# Altium PCB Foc_Core.pcbdoc
Units mil, origin at the board's own origin, x right, y up, seen from the top; angles counter-clockwise.
Board outline 1574.8 x 1574.8 mil, 4 copper layers (Top Layer, Mid-Layer 1, Mid-Layer 2, Bottom Layer); 21 components, 60 nets, 187 pads, 97 vias.
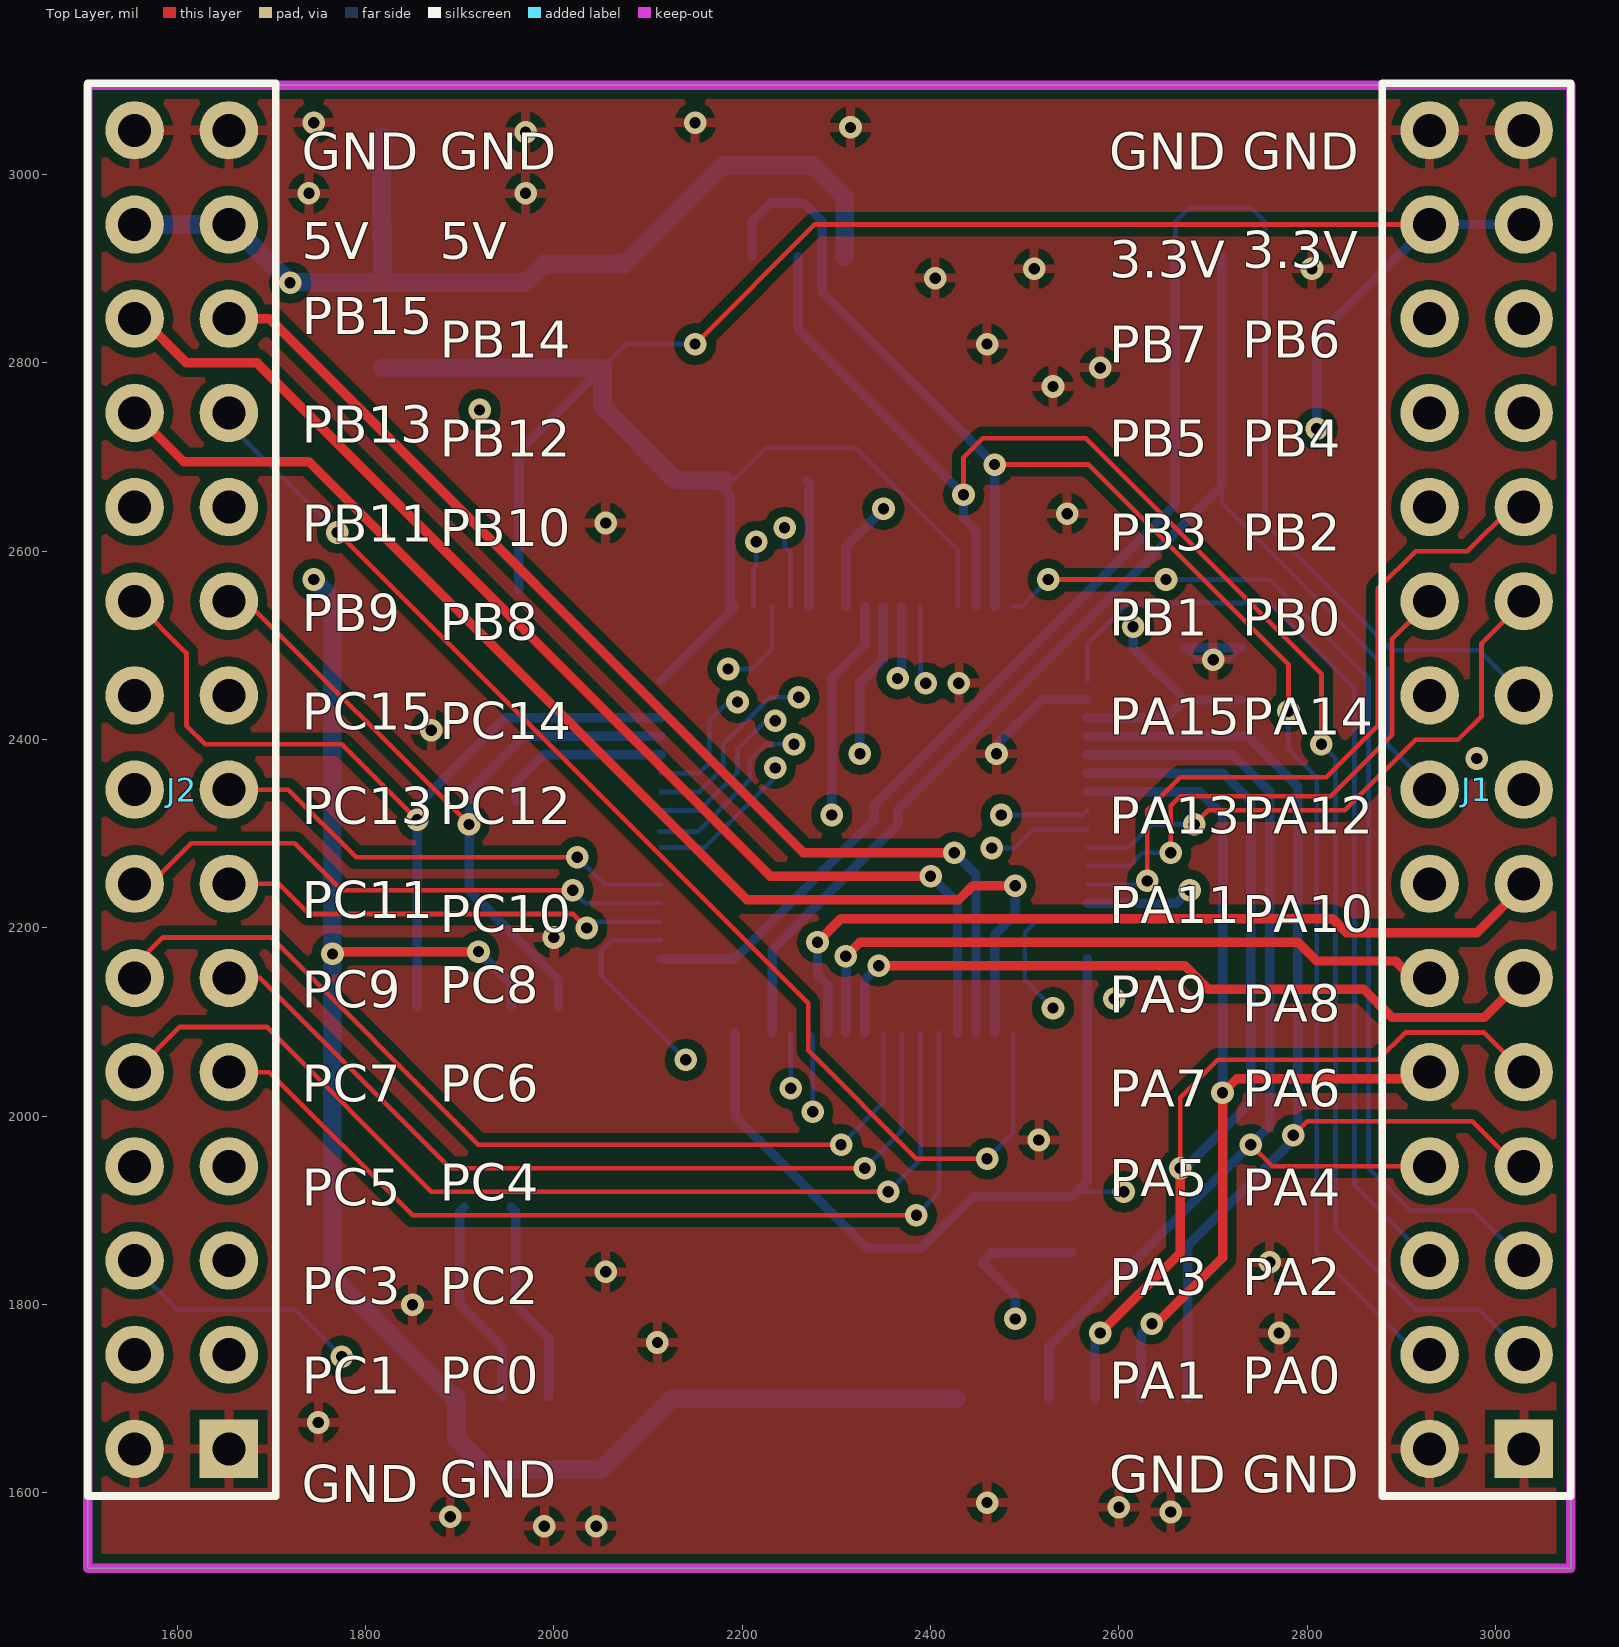
[diagram p0: Top Layer view]
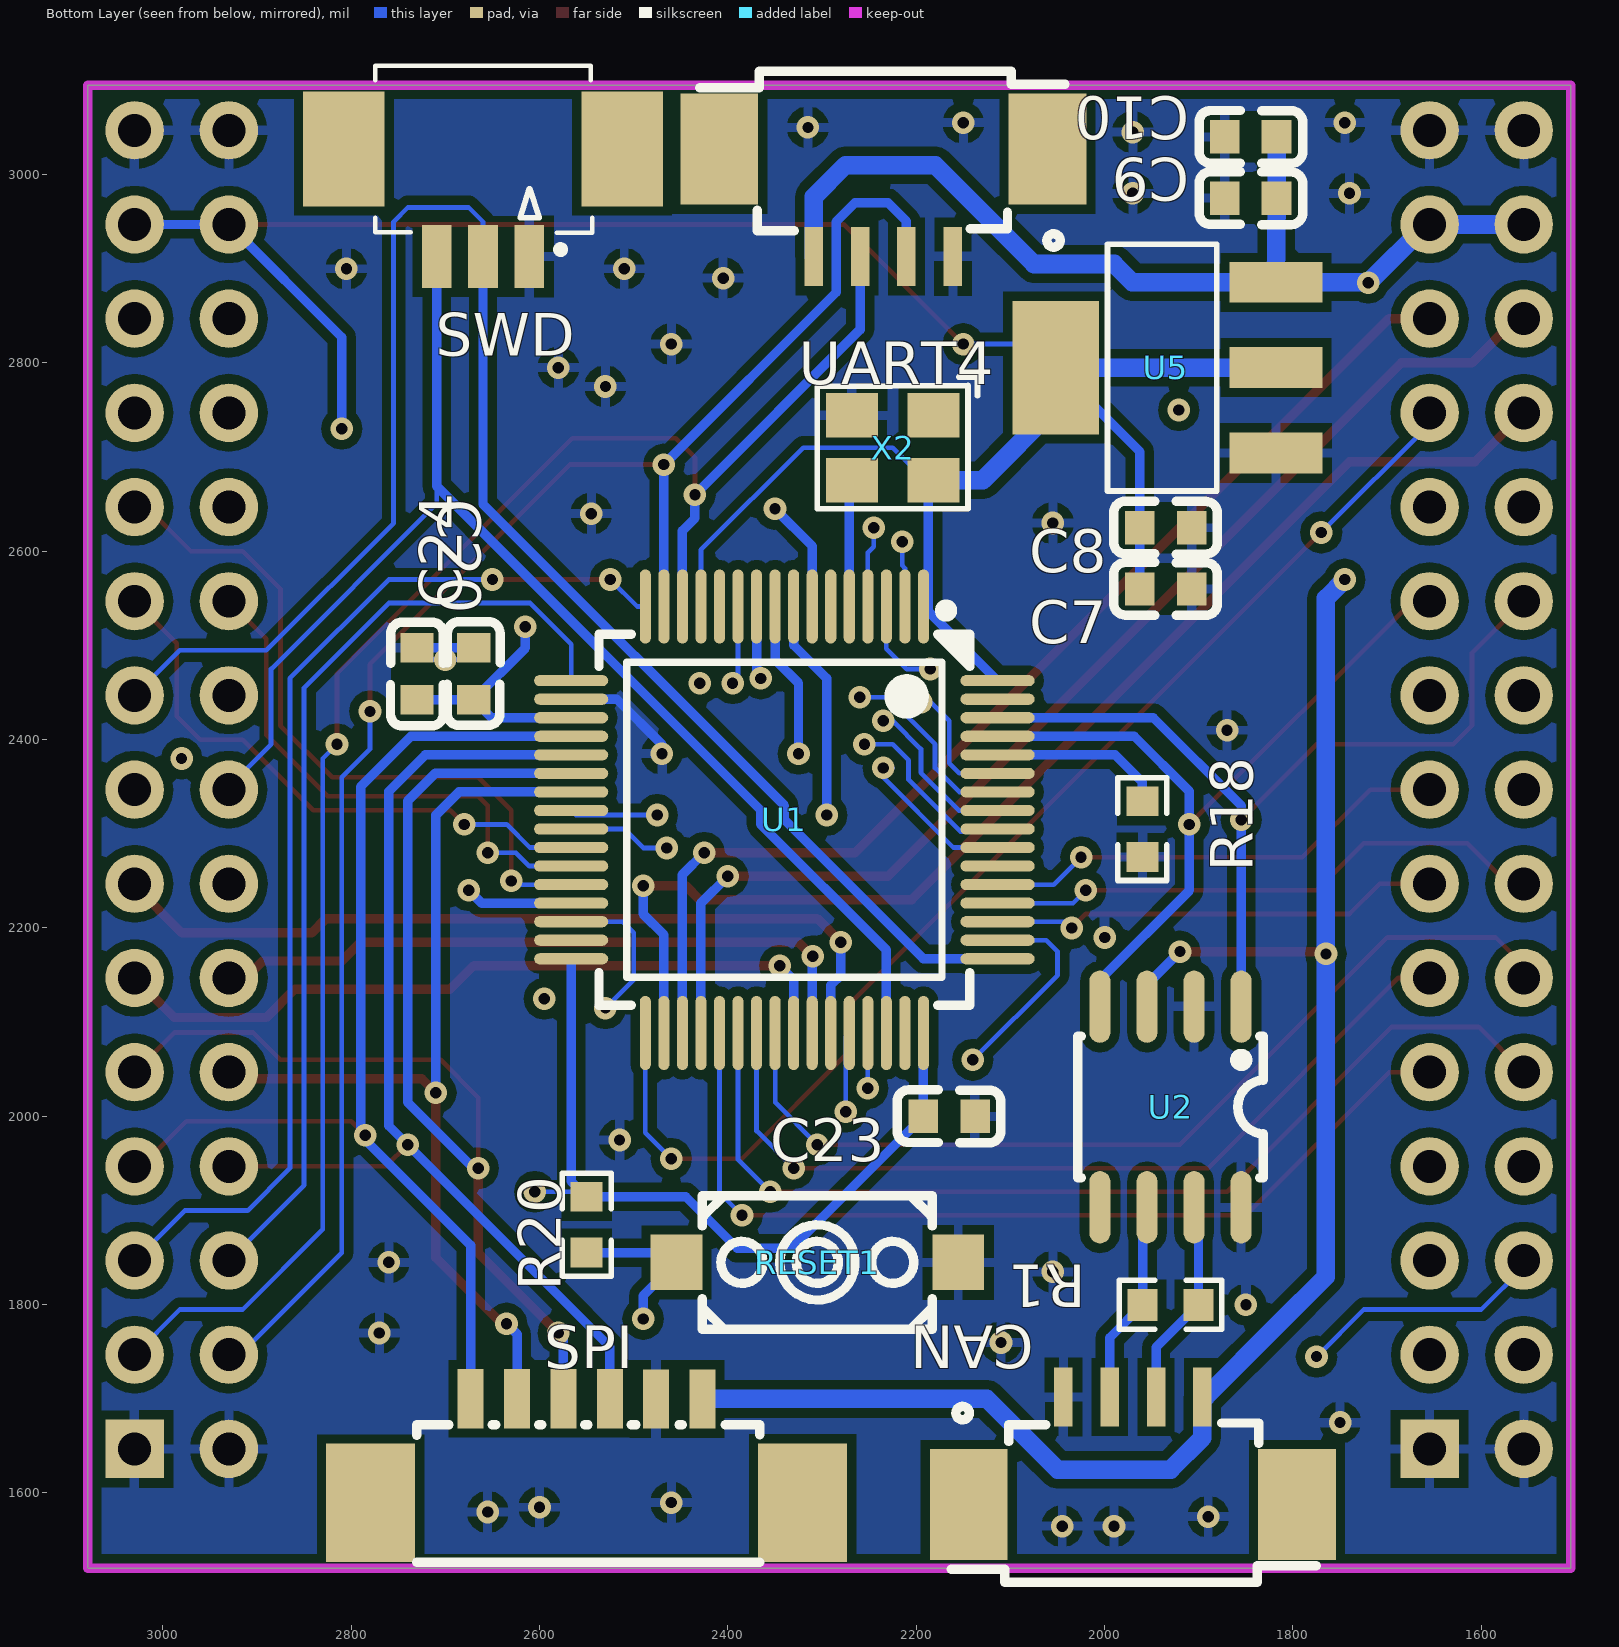
[diagram p1: Bottom Layer view, seen from below]
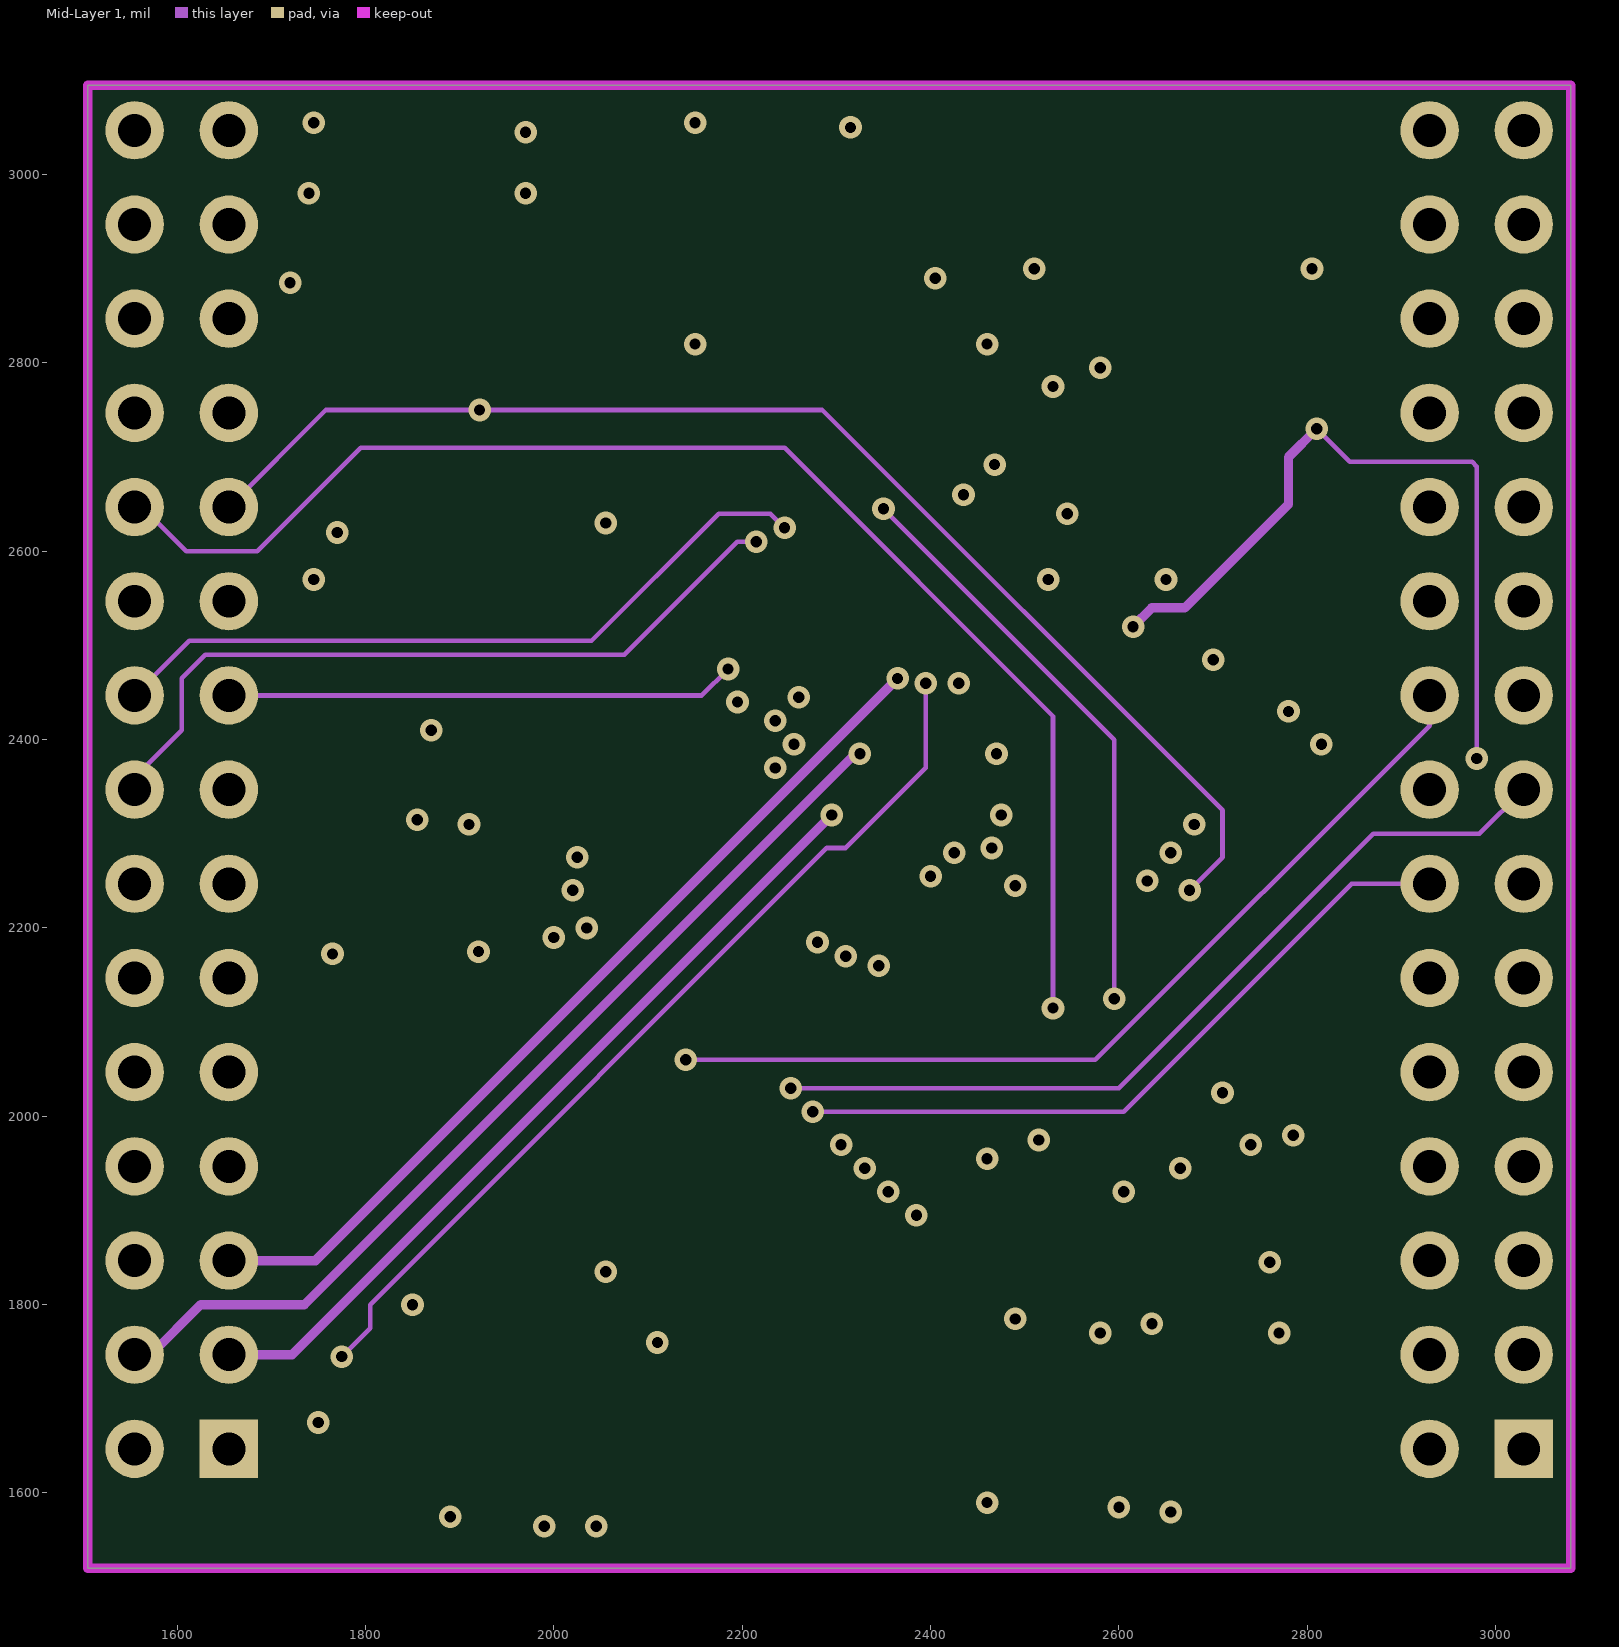
[diagram p2: Mid-Layer 1]
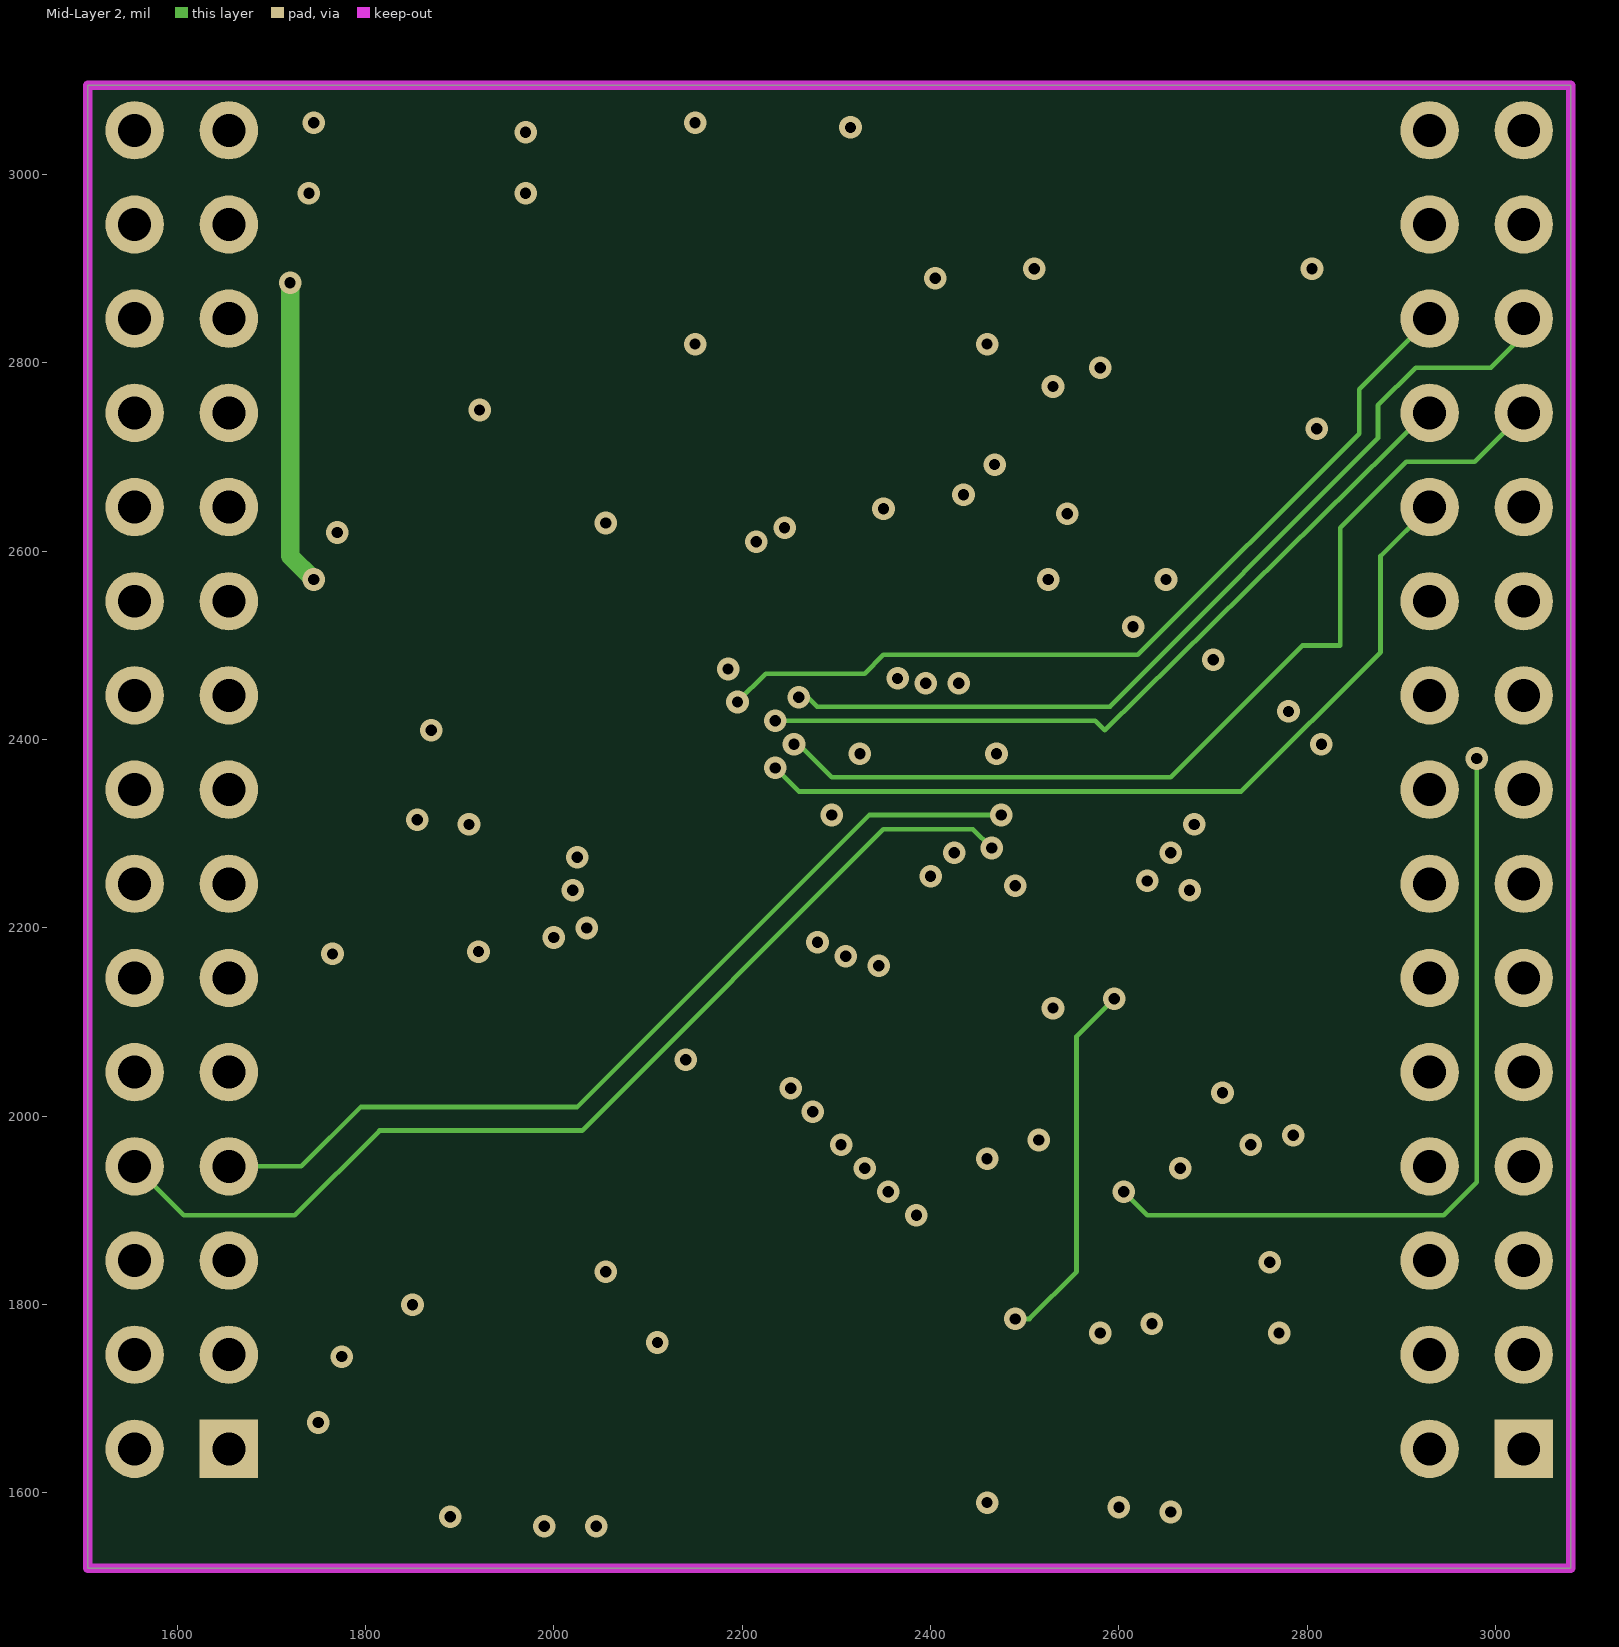
[diagram p3: Mid-Layer 2]

## Layer stack, top to bottom
Top Solder: solder mask 0.4, Solder Resist, Dk 3.5
Top Layer: signal copper 1.4
Dielectric1: dielectric 12.6, FR-4, Dk 4.8
Mid-Layer 1: signal copper 1.4
Dielectric3: dielectric 12.6, FR-4, Dk 4.8
Mid-Layer 2: signal copper 1.4
Dielectric2: dielectric 12.6, FR-4, Dk 4.8
Bottom Layer: signal copper 1.4
Bottom Solder: solder mask 0.4, Solder Resist, Dk 3.5

## Board outline
1505,1519.96 3079.8,1519.96 3079.8,3094.76 1505,3094.76

## Design rules (kind name [scope] priority, off if disabled: settings)
Clearance [All] p1: gap=10 ignorepadtopadclearanceinfootprint=FALSE except(0: Arc-Hole Track-Hole SMDPad-Hole THPad-Hole Via-Hole Fill-Hole Poly-Hole Region-Hole Text-Hole)
PolygonConnect [All] p1: connectstyle=Relief reliefconductorwidth=10 reliefentries=4 polygonreliefangle="90 Angle" airgapwidth=10
RoutingVias [All] p1: holewidth=28 width=50 viastyle="Through Hole" minholewidth=28 minwidth=50 maxholewidth=28 maxwidth=50
SolderMaskExpansion [All] p1: expansion=4 istentingtop=FALSE
Width [All] p1: maxlimit=10 minlimit=10 preferedwidth=10
30 further rules are at their usual default settings.

## Components (designator, comment, footprint, x,y, rotation, side; value= is the part's Value field where it differs from the comment)
C7 "22u" C0603 1935,2559.76 r0 bottom
C8 "0.1u" C0603 1935,2624.76 r0 bottom
C9 "22u" C0603 1845,2974.76 r180 bottom
C10 "0.1u" C0603 1845,3039.76 r180 bottom
C20 "10uF" C0603 2670,2469.76 r90 bottom
C23 "0.1uF" C0603 2165,1999.76 r0 bottom
C24 "10nF" C0603 2730,2469.76 r270 bottom
CAN "1.25-4P WT" CONN-SMD_1.25-4PWT 1970,1644.76 r180 bottom
J1 "HDR-M-2.54_2x15" HDR-M-2.54_2X15 2979.8,2346.73 r90 top
J2 "HDR-M-2.54_2x15" HDR-M-2.54_2X15 1605,2346.73 r90 top
R1 "120R" R0603 1930,1799.76 r180 bottom
R18 "1k" R0603 1960,2304.76 r270 bottom
R20 "1k" R0603 2550,1884.76 r270 bottom
RESET1 "K2-3.6×6.1_SMD" KEY-SMD_2P-L6.2-W3.6-LS8.0 2305,1844.76 r0 bottom
SPI "1.25T-6P-WT" CONN-SMD_6P-P1.25_1.25T-6P-WT 2550,1644.76 r0 bottom
SWD "1.25T-3PWT" CONN-SMD_3P-P1.25_1.25T-3PWT 2660,2969.76 r0 bottom
U1 "STM32F405RGT6" LQFP-64_L10.0-W10.0-P0.50-LS12.0-BL 2340,2314.76 r180 bottom
U2 "TJA1050T/CM,118" SOIC-8_L5.0-W4.0-P1.27-LS6.0-BL 1930,2009.76 r180 bottom
U5 "AMS1117-3.3" SOT-223-3_L6.5-W3.4-P2.30-LS7.0-BR 1935,2794.76 r0 bottom
UART4 "1.25-4P WT" CONN-SMD_1.25-4PWT 2235,2969.76 r0 bottom
X2 "8MHz" OSC-SMD_4P-L3.2-W2.5-BL 2225,2709.76 r180 bottom

## Footprints (in the part's own frame and the unit in brackets; to place one, negate y for a bottom-side part, rotate by r counter-clockwise, add the part's x,y. Pads: shape width x height; smd on the part's side, far side on the other; paste and mask are expansions set on the pad)
C0603 [mm]
  rect 0.8x0.9 smd: 1(0.7,0) 2(-0.7,0)
  silkscreen extent -1.39,-0.72 1.41,0.71
CONN-SMD_1.25-4PWT [mm]
  rect 0.5x1.6 smd: 1(-1.875,1.45) 2(-0.625,1.45) 3(0.625,1.45) 4(1.875,1.45)
  rect 2.1x3 smd: 5(-4.425,-1.45) 6(4.425,-1.45)
  silkscreen extent -4.9,-3.55 4.95,1.2
CONN-SMD_3P-P1.25_1.25T-3PWT [mm]
  rect 0.8x1.7 smd: 1(-1.25,1.45) 2(0,1.45) 3(1.25,1.45)
  rect 2.2x3.1 smd: 4(3.75,-1.45) 5(-3.75,-1.45)
  silkscreen extent -2.94,-3.7 2.9,1.36
CONN-SMD_6P-P1.25_1.25T-6P-WT [mm]
  rect 0.7x1.6 smd: 1(-3.125,-1.398) 2(-1.875,-1.398) 3(-0.625,-1.399) 4(0.625,-1.401) 5(1.875,-1.401) 6(3.125,-1.402)
  rect 2.4x3.2 smd: 7(5.825,1.402) 8(-5.825,1.401)
  silkscreen extent -4.67,-0.7 4.58,3
HDR-M-2.54_2X15 [mil]
  rect 62x62 hole 35: 1(-700,-50)
  round 62 hole 35: 2(-700,50) 3(-600,-50) 4(-600,50) 5(-500,-50) 6(-500,50) 7(-400,-50) 8(-400,50) 9(-300,-50) 10(-300,50) 11(-200,-50) 12(-200,50) 13(-100,-50) 14(-100,50) 15(0,-50) 16(0,50) 17(100,-50) 18(100,50) 19(200,-50) 20(200,50) 21(300,-50) 22(300,50) 23(400,-50) 24(400,50) 25(500,-50) 26(500,50) 27(600,-50) 28(600,50) 29(700,-50) 30(700,50)
  silkscreen extent -750,-100 750,100
KEY-SMD_2P-L6.2-W3.6-LS8.0 [mm]
  rect 1.4x1.5 smd: 1(3.8,0) 2(-3.8,0)
  silkscreen extent -3.1,-1.8 3.1,1.8
LQFP-64_L10.0-W10.0-P0.50-LS12.0-BL [mm]
  oval 0.3x2 smd: 1(3.75,5.75) 2(3.25,5.75) 3(2.75,5.75) 4(2.25,5.75) 5(1.75,5.75) 6(1.25,5.75) 7(0.75,5.75) 8(0.25,5.75) 9(-0.25,5.75) 10(-0.75,5.75) 11(-1.25,5.75) 12(-1.75,5.75) 13(-2.25,5.75) 14(-2.75,5.75) 15(-3.25,5.75) 16(-3.75,5.75) 33(-3.75,-5.75) 34(-3.25,-5.75) 35(-2.75,-5.75) 36(-2.25,-5.75) 37(-1.75,-5.75) 38(-1.25,-5.75) 39(-0.75,-5.75) 40(-0.25,-5.75) 41(0.25,-5.75) 42(0.75,-5.75) 43(1.25,-5.75) 44(1.75,-5.75) 45(2.25,-5.75) 46(2.75,-5.75) 47(3.25,-5.75) 48(3.75,-5.75)
  oval 2x0.3 smd: 17(-5.75,3.75) 18(-5.75,3.25) 19(-5.75,2.75) 20(-5.75,2.25) 21(-5.75,1.75) 22(-5.75,1.25) 23(-5.75,0.75) 24(-5.75,0.25) 25(-5.75,-0.25) 26(-5.75,-0.75) 27(-5.75,-1.25) 28(-5.75,-1.75) 29(-5.75,-2.25) 30(-5.75,-2.75) 31(-5.75,-3.25) 32(-5.75,-3.75) 49(5.75,-3.75) 50(5.75,-3.25) 51(5.75,-2.75) 52(5.75,-2.25) 53(5.75,-1.75) 54(5.75,-1.25) 55(5.75,-0.75) 56(5.75,-0.25) 57(5.75,0.25) 58(5.75,0.75) 59(5.75,1.25) 60(5.75,1.75) 61(5.75,2.25) 62(5.75,2.75) 63(5.75,3.25) 64(5.75,3.75)
  silkscreen extent -5,-5 5,5.79
OSC-SMD_4P-L3.2-W2.5-BL [mm]
  rect 1.4x1.2 smd: 1(1.1,0.875) 2(-1.1,0.875) 3(-1.1,-0.875) 4(1.1,-0.875)
  silkscreen extent -2.03,-1.65 2.29,1.9
R0603 [mil]
  rect 31.75x34.02 smd: 1(29.65,0) 2(-29.65,0)
  silkscreen extent -55,-26 55,26
SOIC-8_L5.0-W4.0-P1.27-LS6.0-BL [mil]
  oval 22.38x76.78 smd: 1(75,106.5) 2(25,106.5) 3(-25,106.5) 4(-75,106.5) 5(-75,-106.5) 6(-25,-106.5) 7(25,-106.5) 8(75,-106.5)
  silkscreen extent -98,-75 98,75
SOT-223-3_L6.5-W3.4-P2.30-LS7.0-BR [mm]
  rect 2.5x1.1 smd: 1(-2.97,2.3) 2(-2.97,0) 3(-2.97,-2.3)
  rect 2.34x3.6 smd: 4(2.97,0)
  silkscreen extent -1.37,-3.33 1.57,3.33

## Via types
v1: diameter 24, hole 12, Top Layer to Bottom Layer, 97 vias

## Nets (pads, with @x,y where several pads share a name; then routed paths per layer and width w, separated by ;. In a path a pad name is that pad's centre, name@x,y a point inside that pad or via, vN(x,y) a via of type N, cw(c..) or ccw(c..) an arc to the next point about the centre after c; other vN are vias at no path point)
+3.3V: C7.1 C8.1 C20.2 C23.1 C24.1 J1.27 J1.28 R20.2 U1.1 U1.13 U1.19 U1.32 U1.48 U1.64 U5.2 U5.4 X2.4 | length 5406.1
  Top Layer w5: v1(2150,2819.76) 2276.97,2946.73 J1.28
  Mid-Layer 1 w5: v1(2810,2729.76) 2845,2694.76 2975,2694.76 2980,2689.76 v1(2980,2379.76)
  Mid-Layer 1 w10: v1(2615,2519.76) 2635,2539.76 2670,2539.76 2780,2649.76 2780,2699.76 v1(2810,2729.76)
  Mid-Layer 2 w5: v1(2605,1919.76) 2630,1894.76 2945,1894.76 2980,1929.76 v1(2980,2379.76)
  Bottom Layer w5: U5.4 2076.93,2819.76 v1(2150,2819.76) ; X2.4 2190.55,2675.31 2225,2709.76 2320,2709.76 2428.6,2601.16 U1.13@2428.6,2541.16 ; R20.2 2555.34,1919.76 v1(2605,1919.76)
  Bottom Layer w10: C7.1 C8.1 1962.56,2705.39 U5.4 ; U1.64 U1.1 ; X2.4@2176.69,2670.31 2187.36,2659.64 U1.1@2187.36,2536.13 ; U1.48 C23.1 2332.6,1859.76 2390,1859.76 2444.7,1914.46 R20.2@2550,1914.46 ; R20.2 2566.37,1930.79 U1.32 ; U1.19 2650.83,2423.03 C20.2 ; v1(2615,2519.76) 2615,2497.2 C20.2 ; C24.1 C20.2 ; v1(2810,2729.76) 2810,2826.93 J1.28 J1.27
  Bottom Layer w19.68: U5.2 U5.4 2051.93,2752.83 2129.45,2675.31 X2.4
+5V: C9.1 C10.1 CAN.4 J2.27 J2.28 SPI.1 U2.3 U5.3 UART4.4 | length 3169
  Top Layer w10: v1(1765,2172.26) 1767.5,2174.76 v1(1920,2174.76)
  Mid-Layer 2 w19.68: v1(1720,2884.76) 1720,2594.76 v1(1745,2569.76)
  Bottom Layer w10: v1(1920,2174.76) 1955,2139.76 U2.3
  Bottom Layer w19.68: J2.28 J2.27 1658.03,2946.73 v1(1720,2884.76) 1720.55,2885.31 U5.3 ; v1(1745,2569.76) 1765,2549.76 v1(1765,2172.26) 1765,1829.76 1815,1779.76 1892.92,1701.84 CAN.4 1896.2,1658.56 1930,1624.76 2050,1624.76 2125,1699.76 SPI.1 ; C9.1 U5.3 1970.5,2885.26 1990,2904.76 2075,2904.76 2180,3009.76 2275,3009.76 2308.8,2975.96 UART4.4 ; C9.1 C10.1
CAN1_RX: J2.19 U1.61 U2.4 | length 848.9
  Top Layer w5: J2.19 1673.03,2546.73 v1(1910,2309.76)
  Bottom Layer w10: U2.4 2005,2144.76 1910,2239.76 1910,2344.76 1968.6,2403.36 U1.61@2113.6,2403.36
CAN1_TX: J2.20 U1.62 U2.1 | length 951.9
  Top Layer w5: J2.20 1610,2491.73 1610,2434.76 1610,2414.76 1630,2394.76 1775,2394.76 v1(1855,2314.76)
  Bottom Layer w10: U2.1 1855,2329.76 1948.3,2423.06 U1.62@2113.6,2423.06
CAN_H: CAN.3 R1.1 U2.7 | length 222
  Bottom Layer w10: U2.7 1900.34,1898.6 R1.1 1945.4,1754.7 CAN.3
CAN_L: CAN.2 R1.2 U2.6 | length 217.8
  Bottom Layer w10: U2.6 1959.66,1898.6 R1.2 1994.61,1764.81 CAN.2
GND: C7.2 C8.2 C9.2 C10.2 C20.1 C23.2 C24.2 CAN.1 J1.1 J1.2 J1.29 J1.30 J2.1 J2.2 J2.29 J2.30 R18.1 RESET1.2 SPI.2 SWD.1 U1.12 U1.18 U1.63 U2.2 U2.8 U5.1 UART4.1 X2.2 | length 256.6
  Bottom Layer w5: C20.1 2682.56,2484.76 v1(2700,2484.76) 2717.44,2484.76 C24.2
  Bottom Layer w10: v1(2470,2384.76) 2470,2394.76 2517.95,2442.71 U1.18 ; C20.1 C24.2
  other v1: 1990,1564.76 2045,1564.76 1890,1574.76 2655,1579.76 2600,1584.76 2460,1589.76 1750,1674.76 2110,1759.76 2770,1769.76 1850,1799.76 2055,1834.76 2760,1844.76 2515,1974.76 2000,2189.76 1870,2409.76 2430,2459.76 2055,2629.76 2545,2639.76 2530,2774.76 2580,2794.76 2460,2819.76 2405,2889.76 2510,2899.76 2805,2899.76 1740,2979.76 1970,2979.76 1970,3044.76 2315,3049.76 1745,3054.76 2150,3054.76
IIC1_SCL: J1.25 U1.58 | length 1178
  Mid-Layer 2 w5: v1(2260,2444.76) 2269.46,2444.76 2279.46,2434.76 ; 2280,2434.76 2590.72,2434.76 ; 2590,2434.76 2875,2719.76 2875,2754.76 2915,2794.76 2995,2794.76 3029.8,2829.56 J1.25@3029.8,2846.76
  Bottom Layer w5: U1.58 2154.5,2344.26 2180,2369.76 2180,2394.76 2230,2444.76 v1(2260,2444.76)
IIC1_SDA: J1.26 U1.59 | length 1070.2
  Mid-Layer 2 w5: v1(2195,2439.76) 2225,2469.76 2330,2469.76 2350,2489.76 2620,2489.76 2855,2724.76 2855,2771.93 J1.26
  Bottom Layer w5: U1.59 2154.2,2363.96 2165,2374.76 2165,2419.76 2185,2439.76 v1(2195,2439.76)
INC_A: J2.9 U1.37 | length 996.5
  Top Layer w5: J2.9@1655,2046.76 1698,2046.76 1850,1894.76 v1(2385,1894.76)
  Bottom Layer w5: v1(2385,1894.76) 2408.9,1918.66 U1.37
INC_B: J2.10 U1.38 | length 1075.2
  Top Layer w5: J2.10 1603.03,2094.76 1695,2094.76 1870,1919.76 v1(2355,1919.76)
  Bottom Layer w5: v1(2355,1919.76) 2389.21,1953.97 U1.38
INC_Z: J2.11 U1.39 | length 918.7
  Top Layer w5: J2.11 1688.03,2146.73 1890,1944.76 v1(2330,1944.76)
  Bottom Layer w5: v1(2330,1944.76) 2369.53,1984.29 U1.39
IU: J2.3 U1.8 | length 1113.3
  Mid-Layer 1 w10: J2.3@1655,1746.76 1722,1746.76 v1(2295,2319.76)
  Bottom Layer w10: v1(2295,2319.76) 2295,2464.76 2330.16,2499.92 U1.8
IV: J2.4 U1.9 | length 1200.9
  Mid-Layer 1 w10: J2.4@1555,1746.76 1572,1746.76 1625,1799.76 1735,1799.76 2320,2384.76 v1(2325,2384.76)
  Bottom Layer w10: v1(2325,2384.76) 2325,2459.76 2349.84,2484.6 U1.9
IW: J2.5 U1.10 | length 1044.2
  Mid-Layer 1 w10: J2.5 1746.97,1846.73 v1(2365,2464.76)
  Bottom Layer w10: v1(2365,2464.76) 2369.53,2469.29 U1.10
PA2: J1.5 U1.16 | length 1158.1
  Top Layer w5: v1(2525,2569.76) v1(2650,2569.76)
  Bottom Layer w5: U1.16 2496.37,2541.13 v1(2525,2569.76) ; v1(2650,2569.76) 2760,2569.76 2865,2464.76 2865,1944.76 2910,1899.76 2976.8,1899.76 J1.5@3029.8,1846.76
PA3: J1.6 U1.17 | length 1018.8
  Bottom Layer w5: U1.17 2566.4,2501.16 2610,2544.76 2760,2544.76 2850,2454.76 2850,1926.56 J1.6@2929.8,1846.76
PA11: J1.14 U1.44 | length 840.3
  Mid-Layer 1 w5: v1(2275,2004.76) 2605,2004.76 2847,2246.76 J1.14@2929.8,2246.76
  Bottom Layer w5: U1.44 2275,2084.49 v1(2275,2004.76)
PA12: J1.15 U1.45 | length 968.3
  Mid-Layer 1 w5: v1(2251.42,2029.76) 2600,2029.76 2870,2299.76 2982.8,2299.76 J1.15@3029.8,2346.76
  Bottom Layer w5: v1(2251.42,2029.76) U1.45
PA15: J1.18 U1.50 | length 1189.9
  Mid-Layer 1 w5: v1(2140,2059.76) 2575,2059.76 2929.8,2414.56 J1.18@2929.8,2446.76
  Bottom Layer w5: U1.50@2113.6,2186.86 2062.1,2186.86 2050,2174.76 2050,2149.76 v1(2140,2059.76)
PB0: J1.19 U1.26 | length 616.9
  Top Layer w5: v1(2680,2309.76) 2695,2324.76 2840,2324.76 2915,2399.76 2960,2399.76 2985,2424.76 2985,2501.96 J1.19@3029.8,2546.76
  Bottom Layer w5: U1.26@2566.4,2285.26 2610.5,2285.26 2635,2309.76 v1(2680,2309.76)
PB1: J1.20 U1.27 | length 569
  Top Layer w5: v1(2655,2279.76) 2655,2299.76 2655,2329.76 2665,2339.76 2825,2339.76 2890,2404.76 2890,2506.93 J1.20
  Bottom Layer w5: U1.27 2610.79,2265.55 2625,2279.76 v1(2655,2279.76)
PB2: J1.21 U1.28 | length 758.4
  Top Layer w5: v1(2630,2249.76) 2630,2324.76 2665,2359.76 2820,2359.76 2875,2414.76 2875,2559.76 2915,2599.76 2970,2599.76 3017,2646.76 J1.21@3029.8,2646.76
  Bottom Layer w5: U1.28 2626.1,2245.86 v1(2630,2249.76)
PB3: J1.22 U1.55 | length 1062.4
  Mid-Layer 2 w5: v1(2235,2369.76) 2260,2344.76 2730,2344.76 2877.8,2492.56 2877.8,2594.76 J1.22@2929.8,2646.76
  Bottom Layer w5: U1.55@2113.6,2285.26 2160.5,2285.26 2235,2359.76 v1(2235,2369.76) v1@2225,2369.76
PB4: J1.23 U1.56 | length 1216.5
  Mid-Layer 2 w5: v1(2255,2394.76) 2260,2394.76 2295,2359.76 2655,2359.76 2795,2499.76 2835,2499.76 2835,2624.76 2905,2694.76 2977.8,2694.76 J1.23@3029.8,2746.76
  Bottom Layer w5: U1.56@2111.81,2302.34 2153.35,2302.34 2208.19,2357.18 2208.19,2377.95 2225,2394.76 v1(2255,2394.76)
PB5: J1.24 U1.57 | length 1012.5
  Mid-Layer 2 w5: v1(2235,2419.76) 2575,2419.76 2585,2409.76 2927,2746.76 J1.24@2929.8,2746.76
  Bottom Layer w5: U1.57 2154.84,2324.6 2195,2364.76 2195,2389.76 2225,2419.76 v1(2235,2419.76)
PB10: J2.21 U1.29 | length 1487.5
  Mid-Layer 1 w5: J2.21@1655,2646.76 1758,2749.76 v1(1921.18,2749.76) 2285,2749.76 2710,2324.76 2710,2274.76 v1(2675,2239.76)
  Bottom Layer w10: U1.29 2661.42,2226.18 v1(2675,2239.76)
PB11: J2.22 U1.30 | length 1631.7
  Mid-Layer 1 w5: J2.22@1555,2646.76 1563,2646.76 1610,2599.76 1685,2599.76 1795,2709.76 2245,2709.76 2530,2424.76 v1(2530,2114.76)
  Bottom Layer w5: v1(2530,2114.76) 2500,2144.76 2500,2164.76 2500,2194.76 2511.73,2206.49 2515,2206.49 U1.30
PB12: J2.23 U1.33 | length 1314.4
  Top Layer w5: v1(1770,2619.76) 2270,2119.76 2270,2069.76 2385,1954.76 v1(2460,1954.76)
  Bottom Layer w5: J2.23 1655,2734.76 v1(1770,2619.76) ; v1(2460,1954.76) 2487.64,1982.4 U1.33
PC3: J2.6 U1.11 | length 1333.6
  Mid-Layer 1 w5: v1(1775,1744.76) 1805,1774.76 1805,1799.76 2290,2284.76 2310,2284.76 2395,2369.76 v1(2395,2459.76)
  Bottom Layer w5: J2.6 1555,1839.76 1600,1794.76 1725,1794.76 v1(1775,1744.76) ; U1.11 2389.21,2465.55 v1(2395,2459.76)
PC4: J2.7 U1.24 | length 1067.9
  Mid-Layer 2 w5: J2.7 1731.97,1946.73 1795,2009.76 2025,2009.76 2335,2319.76 v1(2475,2319.76)
  Bottom Layer w5: v1(2475,2319.76) 2561.53,2319.76 U1.24
PC5: J2.8 U1.25 | length 1219.4
  Mid-Layer 2 w5: J2.8 1606.97,1894.76 1725,1894.76 1815,1984.76 2030,1984.76 2350,2304.76 2445,2304.76 v1(2465,2284.76)
  Bottom Layer w5: v1(2465,2284.76) 2490,2284.76 2510.16,2304.92 U1.25
PC9: J2.12 U1.40 | length 1003.8
  Top Layer w5: J2.12@1555,2146.76 1555,2159.76 1585,2189.76 1700,2189.76 1920,1969.76 v1(2305,1969.76)
  Bottom Layer w5: v1(2305,1969.76) 2349.84,2014.6 U1.40
PC10: J2.13 U1.51 | length 480.9
  Top Layer w5: J2.13@1655,2246.76 1708,2246.76 1740,2214.76 2020,2214.76 v1(2035,2199.76)
  Bottom Layer w5: v1(2035,2199.76) 2041.73,2206.49 U1.51
PC11: J2.14 U1.52 | length 602.8
  Top Layer w5: J2.14 1571.97,2246.73 1615,2289.76 1725,2289.76 1775,2239.76 v1(2020,2239.76)
  Bottom Layer w5: v1(2020,2239.76) 2033.58,2226.18 U1.52
PC12: J2.15 U1.53 | length 500.4
  Top Layer w5: J2.15 1718.03,2346.73 1790,2274.76 v1(2025,2274.76)
  Bottom Layer w5: v1(2025,2274.76) 2053.9,2245.86 U1.53
PC13: J2.16 U1.2 | length 878.7
  Mid-Layer 1 w5: J2.16 1555,2359.76 1605,2409.76 1605,2464.76 1630,2489.76 2075,2489.76 2195,2609.76 v1(2215,2609.76)
  Bottom Layer w5: U1.2@2212.05,2541.13 2212.05,2581.81 2215,2584.76 v1(2215,2609.76)
PC14: J2.17 U1.3 | length 642
  Mid-Layer 1 w5: J2.17 2156.97,2446.73 v1(2185,2474.76)
  Bottom Layer w5: v1(2185,2474.76) 2210,2474.76 2231.7,2496.46 U1.3@2231.7,2541.16
PC15: J2.18 U1.4 | length 862.4
  Mid-Layer 1 w5: J2.18@1555,2446.76 1613,2504.76 2040,2504.76 2175,2639.76 2230,2639.76 v1(2245,2624.76)
  Bottom Layer w5: v1(2245,2624.76) 2245,2604.76 2251.4,2598.36 U1.4@2251.4,2541.16
PWM1: J1.11 U1.41 | length 802.5
  Top Layer w10: v1(2345,2159.76) 2670,2159.76 2695,2134.76 2860,2134.76 2890,2104.76 2987.8,2104.76 J1.11@3029.8,2146.76
  Bottom Layer w10: U1.41 2330.16,2144.92 v1(2345,2159.76)
PWM1N: J2.24 U1.34 | length 1320.9
  Top Layer w10: J2.24@1555,2746.76 1607,2694.76 1740,2694.76 2205,2229.76 2430,2229.76 2445,2244.76 v1(2490,2244.76)
  Bottom Layer w10: U1.34 2467.95,2192.71 2490,2214.76 v1(2490,2244.76)
PWM2: J1.12 U1.42 | length 723.3
  Top Layer w10: v1(2310,2169.76) 2325,2184.76 2790,2184.76 2810,2164.76 2893.76,2164.76 2911.79,2146.73 J1.12
  Bottom Layer w10: v1(2310,2169.76) 2310.47,2169.29 U1.42
PWM2N: J2.25 U1.35 | length 1205.9
  Top Layer w10: J2.25@1655,2846.76 1698,2846.76 2265,2279.76 v1(2425,2279.76)
  Bottom Layer w10: v1(2425,2279.76) 2448.27,2256.49 U1.35
PWM3: J1.13 U1.43 | length 890
  Top Layer w10: v1(2280,2184.76) 2305,2209.76 2826.62,2209.76 2841.62,2194.76 2980,2194.76 3029.8,2244.56 J1.13
  Bottom Layer w10: v1(2280,2184.76) 2280,2149.76 2290.79,2138.97 U1.43
PWM3N: J2.26 U1.36 | length 1268.4
  Top Layer w10: J2.26@1555,2846.76 1563,2846.76 1610,2799.76 1685,2799.76 2230,2254.76 v1(2400,2254.76)
  Bottom Layer w10: v1(2400,2254.76) 2428.58,2226.18 U1.36
R18_2: R18.2 U1.60 | length 186.3
  Bottom Layer w10: R18.2@1960,2334.46 1960,2354.76 1989,2383.76 U1.60@2114,2383.76
RESET: R20.1 RESET1.1 U1.7 | length 1308.1
  Mid-Layer 1 w5: v1(2350,2644.76) 2595,2399.76 v1(2595,2124.76)
  Mid-Layer 2 w5: v1(2490,1784.76) 2505,1784.76 2555,1834.76 2555,2084.76 v1(2595,2124.76)
  Bottom Layer w10: U1.7 2310.47,2605.23 v1(2350,2644.76) ; v1(2490,1784.76) 2490,1809.36 RESET1.1 2464.94,1855.1 R20.1
S$1126: 
SPI1_CS: J1.7 SPI.6 U1.20 | length 1217.9
  Top Layer w5: v1(2785,1979.76) 2800,1994.76 2975,1994.76 3023,1946.76 J1.7@3029.8,1946.76
  Bottom Layer w10: U1.20@2566.4,2403.36 2736.4,2403.36 2790,2349.76 2790,1979.76 v1(2785,1979.76) 2785,1974.77 2673,1862.76 SPI.6
SPI1_MISO: J1.9 SPI.4 U1.22 | length 1426.4
  Top Layer w5: v1(2665,1944.76) 2665,2019.76 2705,2059.76 2875,2059.76 2904,2088.76 2987.8,2088.76 J1.9@3029.8,2046.76
  Top Layer w10: v1(2580,1769.76) 2665,1854.76 v1(2665,1944.76)
  Bottom Layer w10: U1.22 2615,2363.97 ; U1.22 2710.8,2363.96 2740,2334.76 2740,2014.76 2670,1944.76 v1(2665,1944.76) ; SPI.4 2574.61,1764.37 v1(2580,1769.76)
SPI1_MOSI: J1.10 SPI.5 U1.23 | length 1041.1
  Top Layer w10: v1(2635,1779.76) 2640,1779.76 2710,1849.76 v1(2710,2024.76) 2725,2039.76 2922.83,2039.76 J1.10
  Bottom Layer w10: U1.23 2685.5,2344.26 2710,2319.76 v1(2710,2024.76) ; SPI.5 2623.82,1768.58 v1(2635,1779.76)
SPI1_SCK: J1.8 SPI.3 U1.21 | length 1151.1
  Top Layer w5: v1(2740,1969.76) 2763.03,1946.73 J1.8
  Bottom Layer w10: SPI.3 2525.4,1755.16 2760,1989.76 2760,2344.76 2721.1,2383.66 U1.21
SPI_7: SPI.7
SPI_8: SPI.8
SWC: J1.17 SWD.2 U1.49 | length 1833.1
  Bottom Layer w5: SWD.2 2660,2949.76 2675,2964.76 2740,2964.76 2755,2949.76 2755,2629.76 2890,2494.76 2981.8,2494.76 J1.17@3029.8,2446.76
  Bottom Layer w10: U1.49@2113.6,2167.16 2192.4,2167.16 2340,2314.76 2340,2329.76 2660,2649.76 SWD.2
SWD: J1.16 SWD.3 U1.46 | length 1679.4
  Bottom Layer w5: SWD.3 2709.2,2650.56 2885,2474.76 2885,2394.76 2929.8,2349.96 J1.16@2929.8,2346.76
  Bottom Layer w10: U1.46 2231.7,2176.46 2365,2309.76 2365,2324.76 2709.2,2668.96 SWD.3
U2_5: U2.5
UART4_RX: J1.4 U1.15 UART4.2 | length 1979.4
  Top Layer w5: v1@2467.9,2691.86 2567.9,2691.86 2780,2479.76 v1(2780,2429.76)
  Bottom Layer w5: v1(2780,2429.76) 2780,2389.76 2810,2359.76 2810,1854.76 ; 2810,1854.76 2918.03,1746.73 J1.4 2918,1746.76 2810,1854.76
  Bottom Layer w10: UART4.2 2210.4,2950.16 2230,2969.76 2265,2969.76 2285,2949.76 2285,2874.76 v1(2467.95,2691.81) U1.15
UART4_TX: J1.3 U1.14 UART4.3 | length 1832.4
  Top Layer w5: v1(2435,2659.76) 2435,2699.46 2455.3,2719.76 2565,2719.76 2815,2469.76 v1(2815,2394.76)
  Bottom Layer w5: v1(2815,2394.76) 2830,2379.76 2830,1879.76 2915,1794.76 2930,1794.76 2981.77,1794.76 J1.3
  Bottom Layer w10: UART4.3 2259.6,2835.16 v1(2435,2659.76) 2435,2634.76 2448.3,2621.46 U1.14@2448.3,2541.16
X2_3: U1.5 X2.3 | length 135.3
  Bottom Layer w10: X2.3 2271.1,2672.52 U1.5
pads on no net: CAN.5 CAN.6 SWD.4 SWD.5 U1.6 U1.31 U1.47 U1.54 UART4.5 UART4.6 X2.1

## Polygon pours and split planes (outlines as drawn)
GND on Bottom Layer "Bottom Layer-GND" (solid, pour order 1): 1505,3094.76 3080,3094.76 3080,1519.76 1505,1519.76
GND on Top Layer "Top Layer-GND" (solid, pour order 0): 1505,3094.76 3080,3094.76 3080,1519.76 1505,1519.76

## Keep-outs
Keep-Out Layer:
  the board outline again, w10

## Silkscreen, mask and mechanical layers (free items; w line width, h text height)
Top Overlay:
  text "GND" at 1732.5,3005.08 h39.37
  text "GND" at 1878.75,3005.08 h39.37
  text "GND" at 2589.65,3005.08 h39.37
  text "GND" at 2730.7,3005.08 h39.37
  text "5V" at 1732.5,2910.08 h39.37
  text "5V" at 1878.75,2910.08 h39.37
  text "3.3V" at 2730.7,2900.08 h39.37
  text "3.3V" at 2589.66,2890.08 h39.37
  text "PB15" at 1732.5,2830.08 h39.37
  text "PB14" at 1878.75,2805.08 h39.37
  text "PB6" at 2730.7,2805.08 h39.37
  text "PB7" at 2589.65,2800.08 h39.37
  text "PB13" at 1732.5,2715.08 h39.37
  text "PB12" at 1878.75,2700.08 h39.37
  text "PB5" at 2589.65,2700.08 h39.37
  text "PB4" at 2730.7,2700.08 h39.37
  text "PB11" at 1732.5,2610.08 h39.37
  text "PB10" at 1878.75,2605.08 h39.37
  text "PB3" at 2589.65,2600.08 h39.37
  text "PB2" at 2730.7,2600.08 h39.37
  text "PB9" at 1732.5,2515.08 h39.37
  text "PB1" at 2589.65,2510.08 h39.37
  text "PB0" at 2730.7,2510.08 h39.37
  text "PB8" at 1878.75,2505.08 h39.37
  text "PC15" at 1732.5,2410.08 h39.37
  text "PA15" at 2589.65,2405.08 h39.37
  text "PA14" at 2730.7,2405.08 h39.37
  text "PC14" at 1878.75,2400.08 h39.37
  text "PC13" at 1732.5,2310.08 h39.37
  text "PC12" at 1878.75,2310.08 h39.37
  text "PA13" at 2589.65,2300.08 h39.37
  text "PA12" at 2730.7,2300.08 h39.37
  text "PC11" at 1732.5,2210.08 h39.37
  text "PA11" at 2589.65,2205.08 h39.37
  text "PC10" at 1878.75,2195.08 h39.37
  text "PA10" at 2730.7,2195.08 h39.37
  text "PC8" at 1878.75,2120.08 h39.37
  text "PC9" at 1732.5,2115.08 h39.37
  text "PA9" at 2589.65,2110.08 h39.37
  text "PA8" at 2730.7,2100.08 h39.37
  text "PC7" at 1732.5,2015.08 h39.37
  text "PC6" at 1878.75,2015.08 h39.37
  text "PA7" at 2589.65,2010.08 h39.37
  text "PA6" at 2730.7,2010.08 h39.37
  text "PA5" at 2589.65,1915.08 h39.37
  text "PC4" at 1878.75,1910.08 h39.37
  text "PC5" at 1732.5,1905.08 h39.37
  text "PA4" at 2730.71,1905.08 h39.37
  text "PA3" at 2589.65,1810.08 h39.37
  text "PA2" at 2730.7,1810.08 h39.37
  text "PC3" at 1732.5,1800.08 h39.37
  text "PC2" at 1878.75,1800.08 h39.37
  text "PC1" at 1732.5,1705.08 h39.37
  text "PC0" at 1878.75,1705.08 h39.37
  text "PA0" at 2730.7,1705.08 h39.37
  text "PA1" at 2589.65,1700.08 h39.37
  text "GND" at 2589.65,1600.08 h39.37
  text "GND" at 2730.7,1600.08 h39.37
  text "GND" at 1878.75,1595.08 h39.37
  text "GND" at 1732.5,1590.08 h39.37